# Altium PCB RHINO_V2_PANEL.PcbDoc
Units mm, origin at the board's own origin, x right, y up, seen from the top; angles counter-clockwise.
Board outline 118.9 x 79.4 mm, 2 copper layers (Top Layer, Bottom Layer); 4 components, 0 nets, 12 pads, 0 vias.
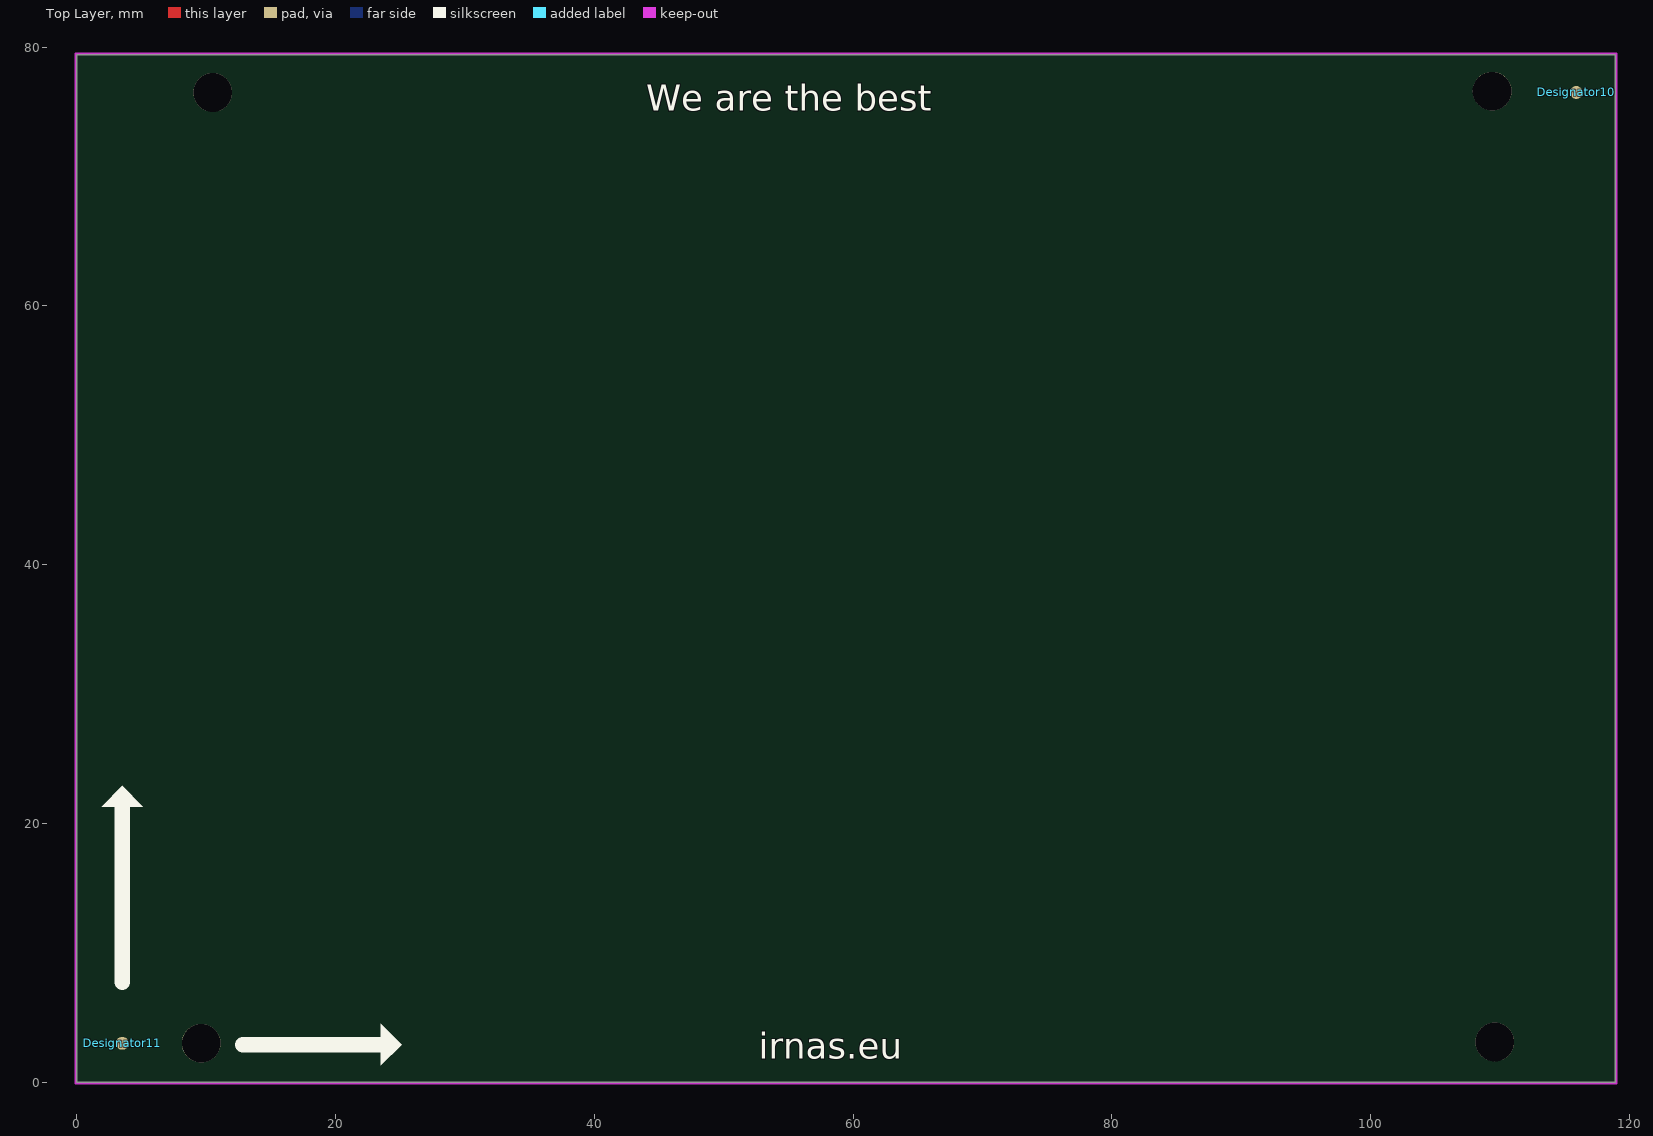
[diagram p0: Top Layer view]
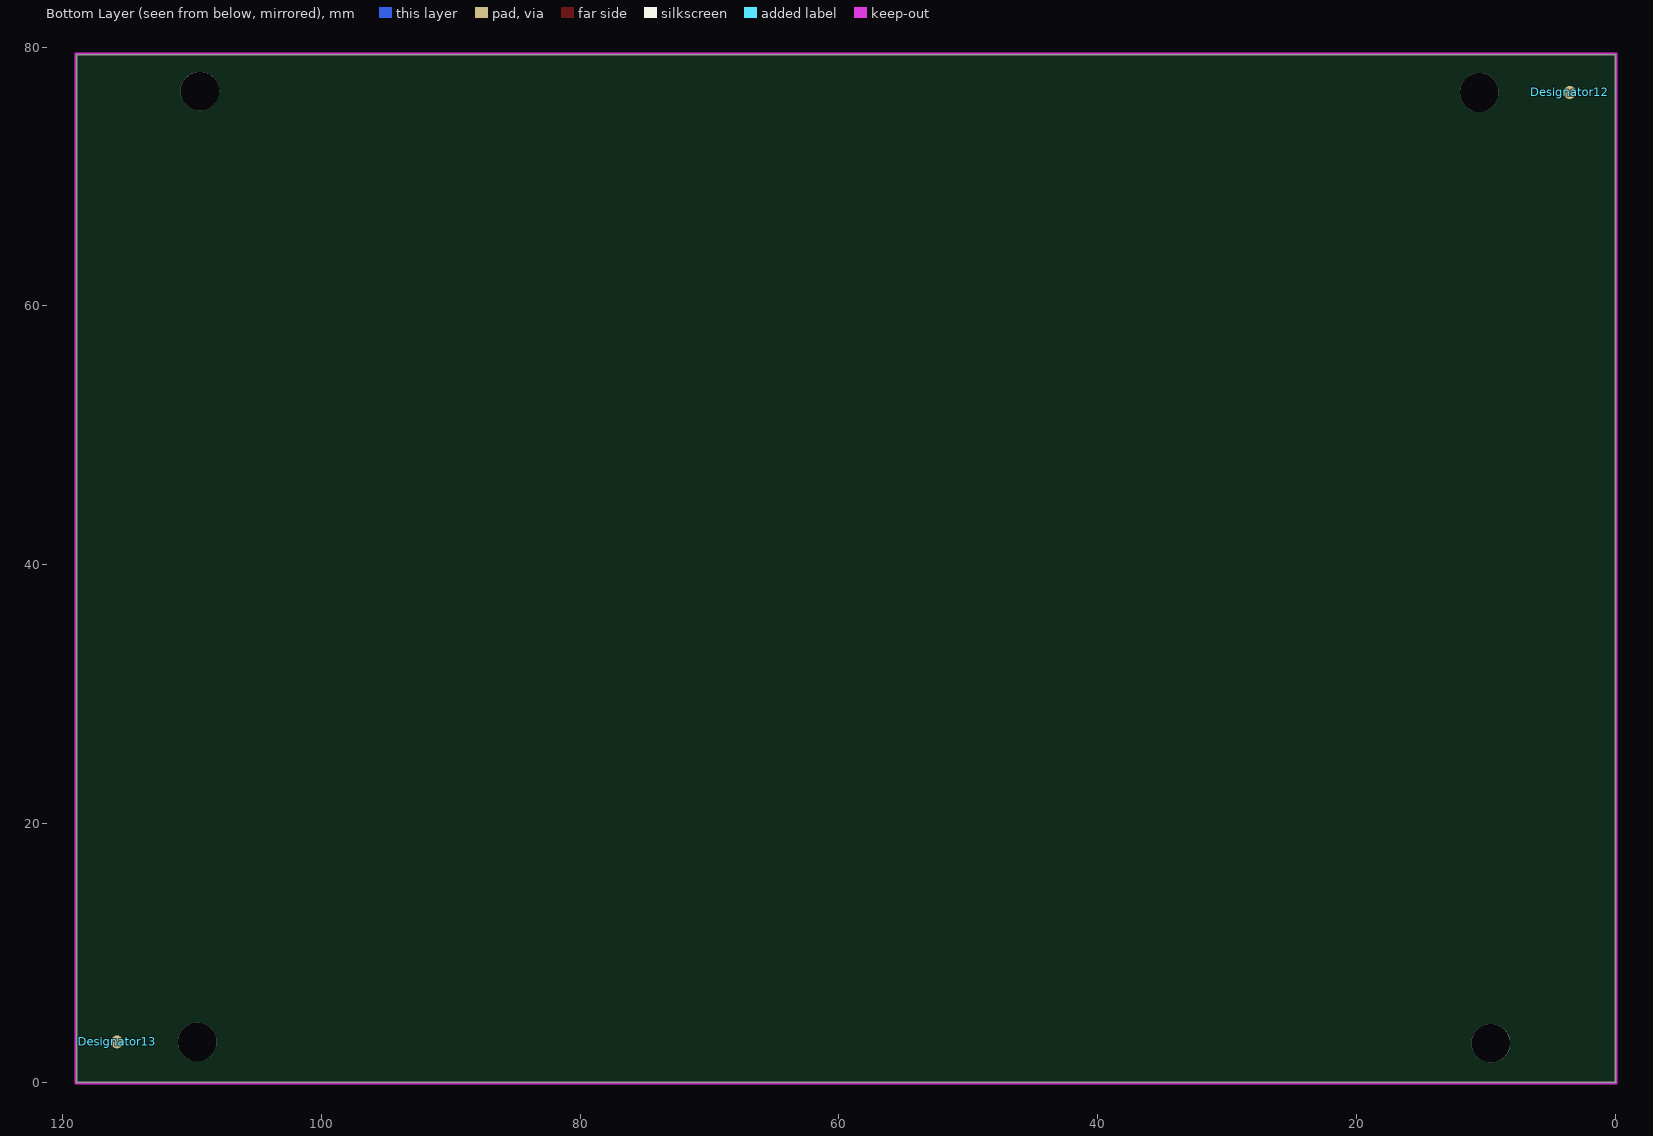
[diagram p1: Bottom Layer view, seen from below]

## Layer stack, top to bottom
Top Solder: solder mask 0.0102, Solder Resist, Dk 3.5
Top Layer: signal copper 0.0356
Dielectric 1: dielectric 0.32, FR-4, Dk 4.8
Bottom Layer: signal copper 0.0356
Bottom Solder: solder mask 0.0102, Solder Resist, Dk 3.5

## Board outline
0,0 118.9,0 118.9,79.4 0,79.4

## Design rules (kind name [scope] priority, off if disabled: settings)
Clearance [All] p1: gap=0.254 ignorepadtopadclearanceinfootprint=FALSE except(0: Arc-Hole Track-Hole SMDPad-Hole THPad-Hole Via-Hole Fill-Hole Poly-Hole Region-Hole Text-Hole)
PolygonConnect [All] p1: connectstyle=Relief reliefconductorwidth=0.254 reliefentries=4 polygonreliefangle="90 Angle" airgapwidth=0.254
RoutingVias [All] p1: holewidth=0.711 width=1.27 viastyle="Through Hole" minholewidth=0.711 minwidth=1.27 maxholewidth=0.711 maxwidth=1.27
SolderMaskExpansion [All] p1: expansion=0.102
Width [All] p1: maxlimit=0.254 minlimit=0.254 preferedwidth=0.254
30 further rules are at their usual default settings.

## Components (designator, comment, footprint, x,y, rotation, side; value= is the part's Value field where it differs from the comment)
Designator10 "Comment" FIDUCAL 115.9,76.5 r180 top
Designator11 "Comment" FIDUCAL 3.5,3 r180 top
Designator12 "Comment" FIDUCAL 3.5,76.5 r0 bottom
Designator13 "Comment" FIDUCAL 115.8,3.1 r0 bottom

## Footprints (in the part's own frame and the unit in brackets; to place one, negate y for a bottom-side part, rotate by r counter-clockwise, add the part's x,y. Pads: shape width x height; smd on the part's side, far side on the other; paste and mask are expansions set on the pad)
FIDUCAL [mm] "FIDUCAL MARKER"
  round 1 smd mask+1: FM(0,0)
  Top Layer pour cut-out: -1.5,0 -1.386,-0.574 -1.061,-1.061 -0.574,-1.386 0,-1.5 0,-1.5 0.574,-1.386 1.061,-1.061 1.386,-0.574 1.5,0 1.5,0 1.386,0.574 1.061,1.061 0.574,1.386 0,1.5 0,1.5 -0.574,1.386 -1.061,1.061 -1.386,0.574 -1.5,0

## Free pads (board coordinates)
  round 3 hole 3 paste+3 mask+0.3: 1(10.5,76.5) 2(9.6,3) 3(109.4,76.6) 4(109.6,3.1)
  round 3 on Top Paste paste+3 mask+0.3: 4(9.6,3) 4(10.5,76.5) 4(109.4,76.6) 4(109.6,3.1)

## Nets (pads, with @x,y where several pads share a name; then routed paths per layer and width w, separated by ;. In a path a pad name is that pad's centre, name@x,y a point inside that pad or via, vN(x,y) a via of type N, cw(c..) or ccw(c..) an arc to the next point about the centre after c; other vN are vias at no path point)
pads on no net: Designator10.FM Designator11.FM Designator12.FM Designator13.FM

## Keep-outs
Keep-Out Layer:
  lines w0.2: -0.1,-0.1 119,-0.1 119,79.5 -0.1,79.5 -0.1,-0.1

## Silkscreen, mask and mechanical layers (free items; w line width, h text height)
Top Overlay:
  region: 3.5,22.9 1.9,21.3 5.1,21.3
  region: 25.1,2.9 23.5,4.5 23.5,1.3
  lines w1.2: 3.5,7.7 3.5,21.9 ; 12.8,2.9 23.8,2.9
  text "We are the best" at 44,75.1 h2
  text "irnas.eu" at 52.7,1.8 h2
V Cut:
  lines w0.2: -8,6 125,6 ; -8,26.1 125,26.1 ; -8,29.6 125,29.6 ; -8,49.7 125,49.7 ; -8,53.2 125,53.2 ; -7.4,73.32 125,73.32 ; 6.9,-5 6.9,85 ; 35,-5 35,85 ; 38.5,-5 38.5,85 ; 81.1,-5 81.1,85 ; 84.6,-5 84.6,85 ; 112.7,-5 112.7,85
  text "V-CUT" at 8.3,85.8 h2 r90
  text "V-CUT" at 36.3,85.8 h2 r90
  text "V-CUT" at 40.3,85.8 h2 r90
  text "V-CUT" at 82.4,85.8 h2 r90
  text "V-CUT" at 86,85.8 h2 r90
  text "V-CUT" at 114,85.8 h2 r90
  text "V-CUT" at 125.6,72.05 h2
  text "V-CUT" at -19,72 h2
  text "V-CUT" at -18.7,52.5 h2
  text "V-CUT" at 125.9,52.2 h2
  text "V-CUT" at -18.7,48.7 h2
  text "V-CUT" at 125.9,48.7 h2
  text "V-CUT" at -19,28.4 h2
  text "V-CUT" at 125.6,28.3 h2
  text "V-CUT" at -19,24.8 h2
  text "V-CUT" at 125.6,24.8 h2
  text "V-CUT" at -19,4.8 h2
  text "V-CUT" at 125.6,4.7 h2
  text "V-CUT" at 8.2,-15 h2 r90
  text "V-CUT" at 36.3,-15 h2 r90
  text "V-CUT" at 40.3,-15 h2 r90
  text "V-CUT" at 81.9,-15 h2 r90
  text "V-CUT" at 86,-15 h2 r90
  text "V-CUT" at 114,-15 h2 r90

## Dimensions
119,79.5 to 119,-0.1 on Mechanical 1
-0.1,79.5 to 119,79.5 on Mechanical 1

## Panel: embedded boards
"..\..\03_LORA_ANT\02_PCB\LORA_ANT.PcbDoc" at 84.65,8.35, 3 rows x 1 columns, spacing 23.6 x 42.5, rotation 0
"MCU.PcbDoc" at 81.05,7.55, 3 rows x 1 columns, spacing 23.6 x 42.5, rotation 0
"..\..\01_GPS\02_PCB\GPS.PcbDoc" at 6.95,6.05, 3 rows x 1 columns, spacing 23.6 x 42.5, rotation 0